# Altium PCB Copy of ThrustLayout.PcbDoc
Units mm, origin at the board's own origin, x right, y up, seen from the top; angles counter-clockwise.
Board outline 97.1 x 64.83 mm, 2 copper layers (Top Layer, Bottom Layer); 50 components, 32 nets, 165 pads, 69 vias.
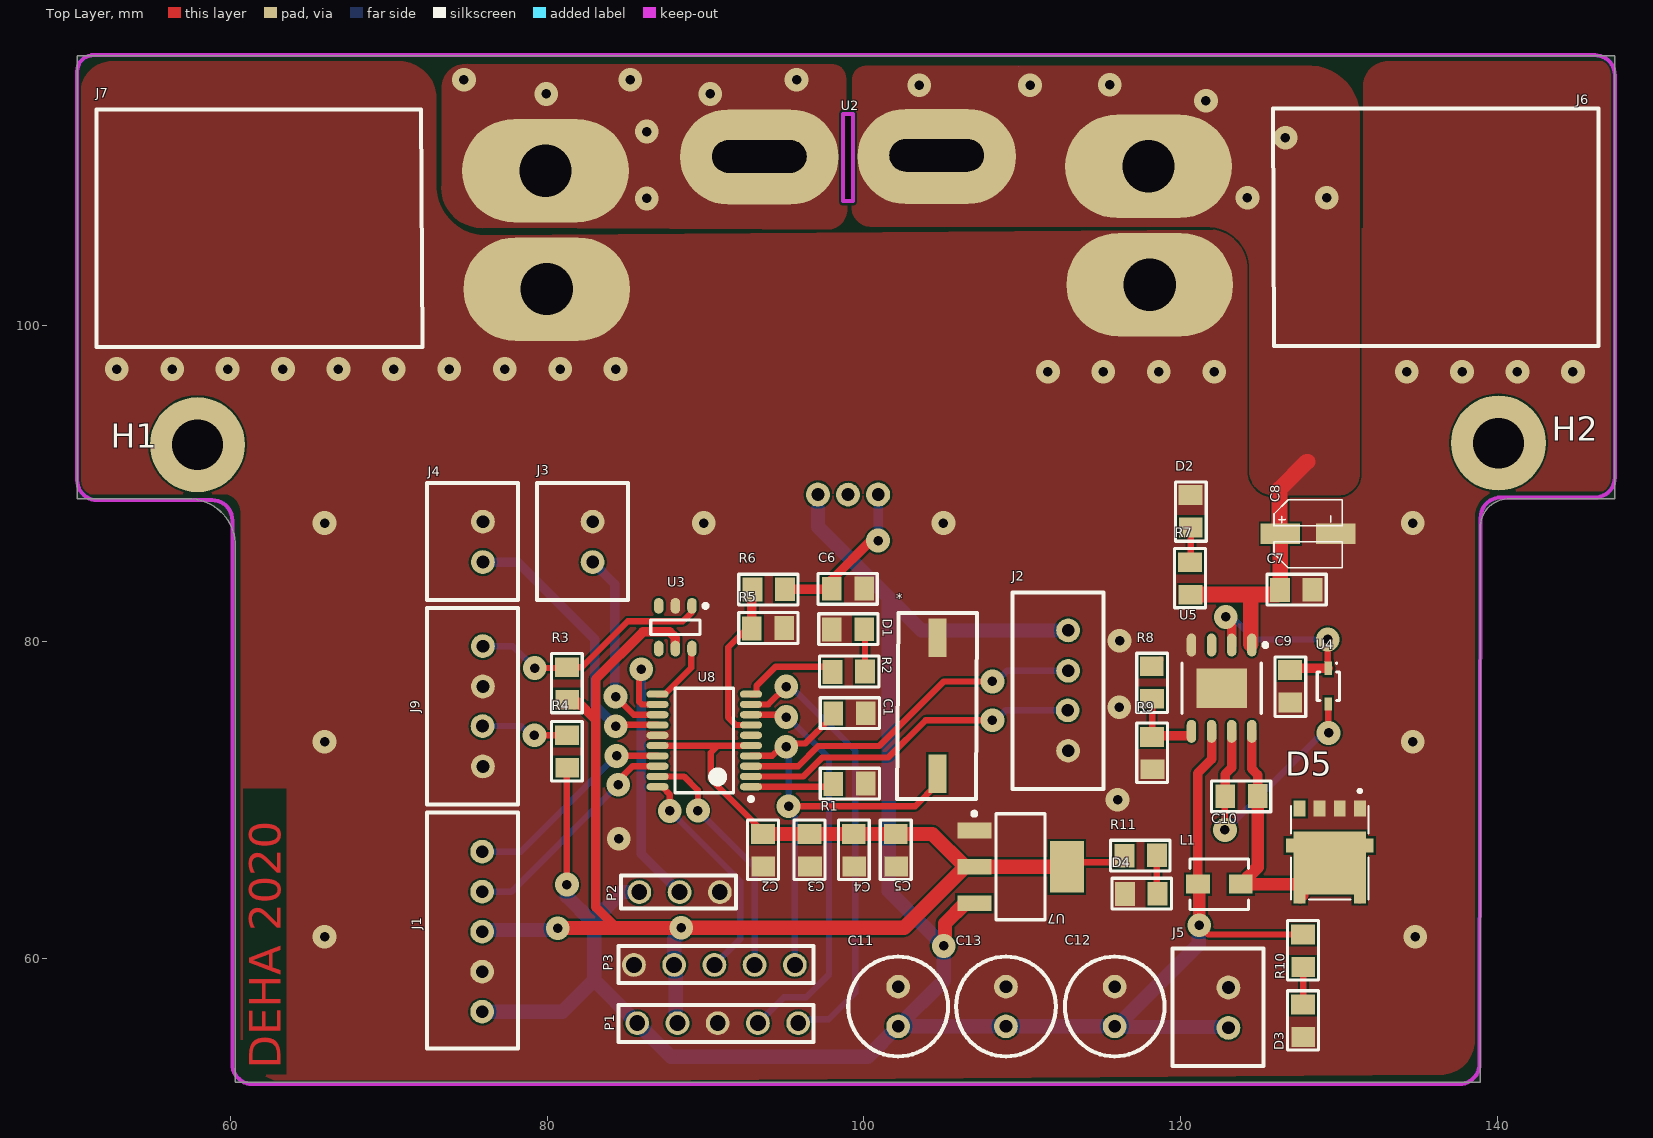
[diagram p0: Top Layer view]
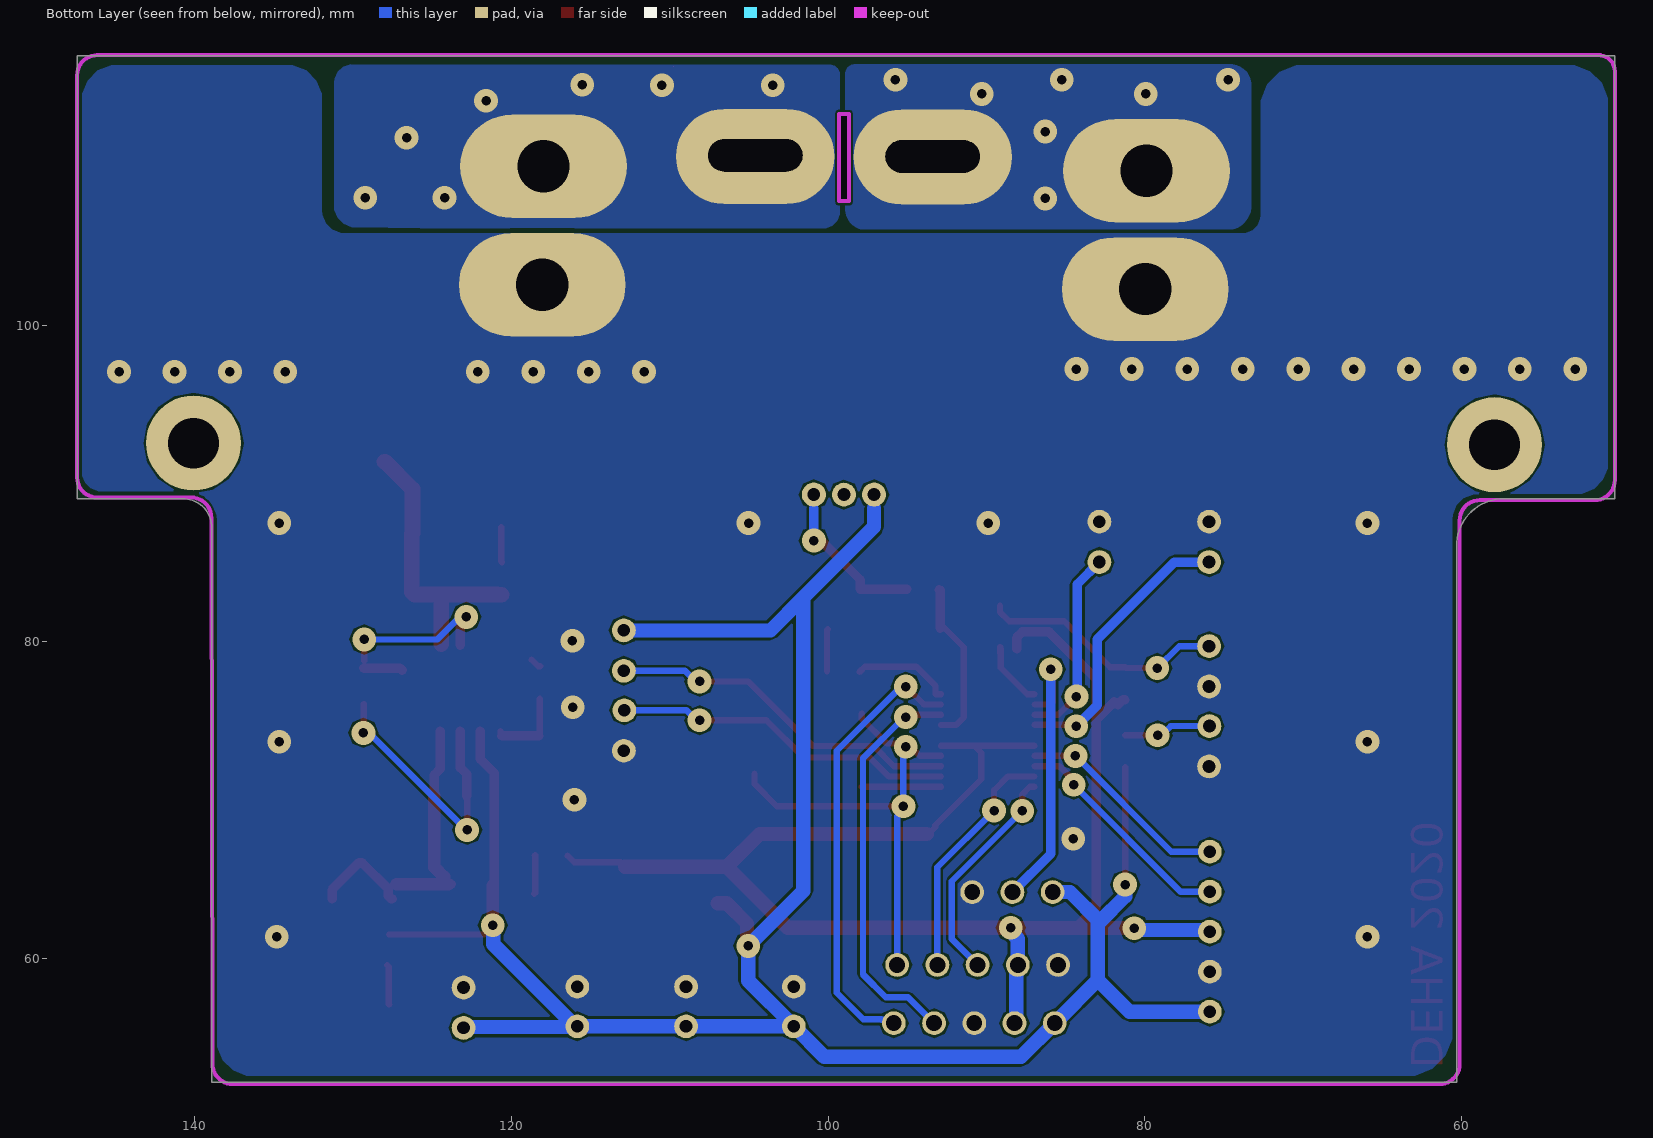
[diagram p1: Bottom Layer view, seen from below]

## Layer stack, top to bottom
Top Solder: solder mask 0.0102, Solder Resist, Dk 3.5
Top Layer: signal copper 0.0356
Dielectric 1: dielectric 0.32, FR-4, Dk 4.8
Bottom Layer: signal copper 0.0356
Bottom Solder: solder mask 0.0102, Solder Resist, Dk 3.5

## Board outline
60.325,52.2 138.925,52.2 138.925,87.225 cw(c140.74,87.225) 140.74,89.04 147.425,89.04 147.425,117.025 50.325,117.025 50.325,89.04 57.335,89.04 cw(c57.335,86.05) 60.325,86.05
cut-out: 98.675,113.342 98.675,107.808 99.325,107.808 99.325,113.342
cut-out: 109.75,116.35

## Design rules (kind name [scope] priority, off if disabled: settings)
Clearance [All] p1: gap=0.127 ignorepadtopadclearanceinfootprint=FALSE except(0: Arc-Hole Track-Hole SMDPad-Hole THPad-Hole Via-Hole Fill-Hole Poly-Hole Region-Hole Text-Hole)
DiffPairsRouting DiffPairsRouting_1 [All] p1: maxlimit=0.254 minlimit=0.254 mostfreqgap=0.254 toplayer_minwidth=0.381 toplayer_maxwidth=0.381 toplayer_prefwidth=0.381 bottomlayer_minwidth=0.381 bottomlayer_maxwidth=0.381 bottomlayer_prefwidth=0.381 maxuncoupledlength=12.7
DiffPairsRouting [All] p2: maxlimit=0.254 minlimit=0.254 mostfreqgap=0.254 toplayer_minwidth=0.381 toplayer_maxwidth=0.381 toplayer_prefwidth=0.381 bottomlayer_minwidth=0.381 bottomlayer_maxwidth=0.381 bottomlayer_prefwidth=0.381 maxuncoupledlength=12.7
PlaneConnect [All] p1: planeconnectstyle=Direct reliefexpansion=0.508 reliefentries=4 reliefconductorwidth=0.254 reliefairgap=0.254
PolygonConnect [All] p1: connectstyle=Direct reliefconductorwidth=0.254 reliefentries=4 polygonreliefangle="90 Angle" airgapwidth=0.254
PolygonConnect PolygonConnect_2 [All vs IsNamedPolygon('Top Layer-IP-')] p2: thpad.connectstyle=Direct thpad.reliefconductorwidth=0.254 thpad.reliefentries=4 thpad.polygonreliefangle="90 Angle" thpad.airgapwidth=0.254 smdpad.connectstyle=Relief smdpad.reliefconductorwidth=0.254 smdpad.reliefentries=4 smdpad.polygonreliefangle="90 Angle" smdpad.airgapwidth=0.254 via.connectstyle=Direct via.reliefconductorwidth=0.254 via.reliefentries=4 via.polygonreliefangle="90 Angle" via.airgapwidth=0.254
PolygonConnect PolygonConnect_1 [All vs IsNamedPolygon('IP-_L02_P020')] p3: thpad.connectstyle=Direct thpad.reliefconductorwidth=0.254 thpad.reliefentries=4 thpad.polygonreliefangle="90 Angle" thpad.airgapwidth=0.254 smdpad.connectstyle=Relief smdpad.reliefconductorwidth=0.254 smdpad.reliefentries=4 smdpad.polygonreliefangle="90 Angle" smdpad.airgapwidth=0.254 via.connectstyle=Direct via.reliefconductorwidth=0.254 via.reliefentries=4 via.polygonreliefangle="90 Angle" via.airgapwidth=0.254
RoomDefinition "" [InComponentClass('Thrust-Schematic')] p1: confinementstyle=ConfineIn formatcopy=TRUE lockcomponents=FALSE outline 0,0 50.8,0 50.8,25.4 0,25.4
RoutingVias [All] p1: holewidth=0.6 width=1.3 viastyle="Through Hole" minholewidth=0.5 minwidth=0.8 maxholewidth=1.5 maxwidth=1.5
SolderMaskExpansion [All] p1: expansion=0.102
Width [All] p1: maxlimit=1.5 minlimit=0.254 preferedwidth=0.4 minimp=50.000000 maximp=50.000000 favimp=50.000000
28 further rules are at their usual default settings.

## Components (designator, comment, footprint, x,y, rotation, side; value= is the part's Value field where it differs from the comment)
* "SWITCH" SWITCH 104.65,75.95 r270 top
C1 "470nF" RES0805 99.1,75.425 r180 top
C2 "1uF" RES0805 93.704,66.85 r270 top
C3 "100nF" RES0805 96.648,66.85 r270 top
C4 "10nF" RES0805 99.442,66.85 r270 top
C5 "1nF" RES0805 102.092,66.85 r270 top
C6 "100nF" RES0805 99,83.425 r0 top
C7 "1uF" RES0805 127.3,83.221 r180 top
C8 "10uF" Cap_4x5.4_SMD 128.05,86.825 r90 top
C9 "100nF" RES0805 126.854,77.196 r90 top
C10 "100nF" RES0805 123.85,70.325 r0 top
C11 "10uF" CAP_THT 102.142,57 r90 top
C12 "10uF" CAP_THT 115.817,57 r90 top
C13 "10uF" CAP_THT 108.95,57 r90 top
D1 "LED0805" RES0805 99,80.725 r180 top
D2 "LED0805" RES0805 120.575,88.254 r90 top
D3 "LED0805" RES0805 127.8,56.075 r270 top
D4 "LED0805" RES0805 117.525,64.023 r180 top
D5 "Diode" Schottky 129.42,66.688 r180 top
H1 "MOUNTING HOLE" "MOUNTING HOLE"#1 49.15,80.275 r0 top
H2 "MOUNTING HOLE" "MOUNTING HOLE"#2 143.3,82.2 r0 top
J1 "I2C" JST_XH_A_5 75.9,61.725 r0 top
J2 "JST_XH_A_4" JST_XH_A_4 112.9,76.925 r0 top
J3 "JST_XH_A_2" JST_XH_A_2 82.875,85.967 r0 top
J4 "JST_XH_A_2" JST_XH_A_2 75.95,85.967 r0 top
J5 "JST_XH_A_2" JST_XH_A_2 123.025,56.55 r0 top
J6 "XT60" XT60 118.05,102.55 r180 top
J7 "XT60" XT60 79.9,109.75 r0 top
J9 "JST_XH_A_4" JST_XH_A_4 75.95,75.933 r0 top
L1 "INDUCTOR" IND-IHLP-1212BZ-11 122.45,64.7 r180 top
P1 "UART_MATLAB" Pin_Header_1x5 85.695,55.925 r90 top
P2 "ESC" Pin_Header_1x3 85.825,64.2 r90 top
P3 "STM32_PROG" Pin_Header_1x5 95.645,59.6 r270 top
R1 "10K" RES0805 99.1,70.975 r180 top
R2 "860R" RES0805 99.05,78.05 r180 top
R3 "10K" RES0805 81.325,77.375 r270 top
R4 "220R" RES0805 81.325,73.075 r270 top
R5 "560R" RES0805 93.95,80.8 r180 top
R6 "560R" RES0805 94,83.375 r0 top
R7 "860R" RES0805 120.675,84 r270 top
R8 "860R" RES0805 118.129,77.431 r90 top
R9 "860R" RES0805 118.279,72.977 r270 top
R10 "860R" RES0805 127.8,60.5 r270 top
R11 "860R" RES0805 117.481,66.577 r0 top
U2 "ACS770" ACS770 99.002,89.3 r0 top
U3 "NL27WZ14" TSOP6 88.1,80.925 r270 top
U4 "DIODE-SOD323" SODFL250X100-2N 129.326,77.203 r270 top
U5 "NVC891330" SOIC8 122.595,77.075 r270 top
U7 "AMS1117" SOT223 109.9,65.8 r0 top
U8 "STM32F030" TSOP20 89.925,73.775 r180 top

## Footprints (in the part's own frame and the unit in brackets; to place one, negate y for a bottom-side part, rotate by r counter-clockwise, add the part's x,y. Pads: shape width x height; smd on the part's side, far side on the other; paste and mask are expansions set on the pad)
ACS770 [mm]
  round 1.524 hole 0.8: 1(-1.9,0) 3(1.9,0)
  round 1.5 hole 0.8: 2(0,0)
  rrect100% 10x6 smd: 4(5.6,21.35) 5(-5.6,21.325)
  rrect100% 10x6 smd far side: 4(5.6,21.35) 5(-5.6,21.325)
  rrect100% 5.97x2.043 hole 2.043 slot 5.97 at 0 deg: 4(5.6,21.42) 5(-5.6,21.35)
Cap_4x5.4_SMD [mm]
  rect 1.3x2.5 smd mask+0.05: 1(0,1.75) 2(0,-1.75)
  Top Layer pour cut-out: -1.65,0.95
  silkscreen extent -2.15,-2.15 2.15,2.15, body extent -2.15,-2.5 2.15,2.5, height 5.4
CAP_THT [mm]
  round 1.5 hole 0.8: 1(-1.275,-0.025) 2(1.225,-0.025)
  silkscreen extent -3.17,-3.17 3.12,3.12
IND-IHLP-1212BZ-11 [mm] "Molded Inductor, 2-Leads, Body 3.33x3.00mm, IPC Medium Density"
  rect 1.5x1.2 smd: 1(-1.35,0) 2(1.35,0)
  silkscreen extent -1.85,-1.6 1.85,1.6, body extent -2.04,-1.6 2.04,1.6, height 2
JST_XH_A_2 [mm]
  round 1.5 hole 0.8: 1(0,1.625) 2(0,-0.925)
  silkscreen extent -3.53,-3.32 2.22,4.08
JST_XH_A_4 [mm]
  round 1.5 hole 0.8: 1(0,3.8) 2(0,1.25) 3(-0.025,-1.25) 4(0,-3.8)
  silkscreen extent -3.52,-6.2 2.22,6.2
JST_XH_A_5 [mm]
  round 1.5 hole 0.8: 1(0,5.025) 2(0,2.5) 3(0,-0.025) 4(0,-2.55) 5(0,-5.075)
  silkscreen extent -3.47,-7.4 2.28,7.5
"MOUNTING HOLE"#1 [mm]
  round 6 hole 3.2 unplated: 1(8.775,12.175)
"MOUNTING HOLE"#2 [mm]
  round 6 hole 3.2 unplated: 1(-3.225,10.35)
Pin_Header_1x3 [mm]
  round 1.5 hole 1: 1(0,0) 2(0,-2.54) 3(0,-5.08)
  silkscreen extent -1.02,-6.1 1.05,1.15
Pin_Header_1x5 [mm]
  round 1.5 hole 1: 1(0,0) 2(0,-2.54) 3(0,-5.08) 4(0,-7.62) 5(0,-10.16)
  silkscreen extent -1.33,-11.12 1.15,1.17
RES0805 [mm]
  rect 1.25x1.5 smd: 1(-1.025,-0.075) 2(1.025,-0.05)
  silkscreen extent -1.9,-1.05 1.85,0.9
Schottky [mm]
  rect 0.75x1 smd: 1(-1.905,-2.795) 1(-0.635,-2.795) 1(0.635,-2.795) 4(1.905,-2.795)
  rect 0.495x0.905 smd: 2(-2.528,-0.453) 2(2.528,-0.453)
  rect 0.75x0.575 smd: 2(-1.905,2.913) 2(1.905,2.913)
  rect 4.56x3.955 smd: 2(0,0.647)
  silkscreen extent -2.45,-4 2.45,2.95, body extent -2.7,-2.95 2.45,3.2, height 1.13
SODFL250X100-2N [mm] "SODFL, 2-Leads, Body 1.25x2.50mm, IPC Medium Density"
  rect 0.85x0.45 smd: 1(-1.125,0) 2(1.125,0)
  silkscreen extent -1.5,-0.7 0.9,0.7, body extent -1.25,-0.67 1.25,0.67, height 1
SOIC8 [mm] "SOIC, 8-Leads, Body 4.90x3.90mm, Pitch 1.27mm, Thermal Pad 3.20x2.51mm, IPC Medium Density"
  oval 1.45x0.6 smd: 1(-2.725,1.905) 2(-2.725,0.635) 3(-2.725,-0.635) 4(-2.725,-1.905) 5(2.725,-1.905) 6(2.725,-0.635) 7(2.725,0.635) 8(2.725,1.905)
  rect 2.51x3.2 smd: 4(0,0)
  silkscreen extent -2.85,-2.5 1.6,2.88, body extent -3,-2.5 3,2.5, height 1.75
SOT223 [mm] "SOT223, 4-Leads, Body 6.50x7.00mm (avg), Pitch 2.30mm, IPC Medium Density"
  rect 2.15x1 smd: 1(-2.925,2.3) 2(-2.925,0) 3(-2.925,-2.3)
  rect 2.15x3.25 smd: 2(2.925,0)
  silkscreen extent -3.05,-3.35 1.55,3.47, body extent -3.5,-3.35 3.5,3.35, height 1.8
SWITCH [mm]
  rect 2.43x1.14 smd: 1(-4.3,0) 2(4.275,0)
  silkscreen extent -5.87,-2.55 5.87,2.5
TSOP6 [mm] "TSOP, 6-Leads, Body 3.00x1.50mm, Pitch 1.05mm, IPC Medium Density"
  oval 1x0.6 smd: 1(-1.35,1.05) 2(-1.35,0) 3(-1.35,-1.05) 4(1.35,-1.05) 5(1.35,0) 6(1.35,1.05)
  silkscreen extent -1.47,-1.55 0.45,2.03, body extent -1.38,-1.55 1.38,1.55, height 1.1
TSOP20 [mm] "TSOP, 20-Leads, Body 6.50x4.40mm, Pitch 0.65mm, IPC Medium Density"
  oval 1.4x0.45 smd: 1(-2.95,2.925) 2(-2.95,2.275) 3(-2.95,1.625) 4(-2.95,0.975) 5(-2.95,0.325) 6(-2.95,-0.325) 7(-2.95,-0.975) 8(-2.95,-1.625) 9(-2.95,-2.275) 10(-2.95,-2.925) 11(2.95,-2.925) 12(2.95,-2.275) 13(2.95,-1.625) 14(2.95,-0.975) 15(2.95,-0.325) 16(2.95,0.325) 17(2.95,0.975) 18(2.95,1.625) 19(2.95,2.275) 20(2.95,2.925)
  silkscreen extent -3.08,-3.3 1.85,3.82, body extent -3.9,-3.55 3.9,3.55, height 1.2
XT60 [mm]
  rrect100% 10.524x6.524 smd: 1(0,0) 2(0.075,-7.475)
  round 1.524 hole 3.3: 1(0,0) 2(0.075,-7.475)
  rrect100% 10.524x6.524 smd far side: 1(0,0) 2(0.075,-7.475)
  silkscreen extent -28.35,-11.12 -7.77,3.88

## Part data
C1 C2 C3 C4 C5 C6 C7 C9 C10: library part CAP0805
C8: library part SMD_Cap_4x5.4
C11 C12 C13: library part CAP_THT
D5: library part "Schottyky Diode", "Schottky Diode"
J1: library part JST_XH_A_5
L1: "IHLP-1212BZ-11"
P1 P3: library part Pin_Header_1x5
P2: library part Pin_Header_1x3
R1 R2 R3 R4 R5 R6 R7 R8 R9 R10 R11: library part RES0805

## Via types
v1: diameter 1.5, hole 0.6, Top Layer to Bottom Layer, 69 vias

## Nets (pads, with @x,y where several pads share a name; then routed paths per layer and width w, separated by ;. In a path a pad name is that pad's centre, name@x,y a point inside that pad or via, vN(x,y) a via of type N, cw(c..) or ccw(c..) an arc to the next point about the centre after c; other vN are vias at no path point)
3.3V: C2.1 C3.1 C4.1 C5.1 J1.3 P1.2 P3.4 R3.2 R11.1 U3.5 U7.2 U8.5 U8.16 | length 101.1
  Top Layer w0.4: R3.2@81.338,76.35 R3.2@81.4,76.35 ; U8.16 90.782,73.45 ; U8.5 90.782,73.45 ; C2.1@93.779,67.875 93.654,67.875 93.229,68.3 93.229,68.425 90.325,71.329 90.325,72.993 90.782,73.45 ; U7.2@112.825,65.8 113.102,66.077 116.031,66.077 R11.1
  Top Layer w0.6: R3.2 R3.2@81.338,76.35 ; R3.2@81.4,76.35 R3.2@81.725,76.025 ; R3.2@81.925,76.225 83.075,75.075 ; 84.388,61.938 83.075,63.25 83.075,75.075 ; U3.5 88.1,79.775 88.101,79.776 88.101,80.274 87.75,80.625 86.05,80.625 83.075,77.65 83.075,75.075
  Top Layer w0.9: v1(80.675,61.925) 80.688,61.938 84.388,61.938 88.463,61.938 v1(88.475,61.95) 102.55,61.95 U7.2@106.4,65.8 ; C2.1@93.779,67.875 C3.1 C4.1 C5.1 104.325,67.875 U7.2@106.4,65.8 ; U7.2@112.825,65.8 106.975,65.8 U7.2@106.4,65.8
  Bottom Layer w0.9: J1.3 76.013,61.813 80.563,61.813 v1(80.675,61.925) ; P1.2 88.13,56.03 88.13,59.495 P3.4 88.025,61.256 88.475,61.706 v1(88.475,61.95)
5V: C11.1 C12.1 C13.1 J1.5 J2.1 J5.2 L1.2 P1.1 P2.1 R4.2 R10.1 U2.1 U5.6 U7.3 | length 150.1
  Top Layer w0.4: v1(81.25,64.675) R4.2@81.25,72.075 ; L1.2 L1.2@121.175,64.625 ; v1(121.175,62.1) 121.75,61.525 R10.1
  Top Layer w0.6: L1.2 121.078,64.722 121.078,71.703 121.96,72.585 U5.6
  Top Layer w0.8: v1(121.175,62.1) L1.2@121.175,64.625
  Top Layer w0.9: v1(105.05,60.8) 105.121,60.871 105.121,62.221 106.4,63.5 U7.3
  Bottom Layer w0.9: J1.5 80.975,56.65 82.973,58.648 ; v1(81.25,64.675) 81.25,63.925 82.85,62.325 84.725,64.2 P2.1 ; 82.973,62.448 82.973,58.648 ; 97.102,88.445 97.102,87.273 101.575,82.8 ; J2.1 103.65,80.725 101.575,82.8 ; v1(121.175,62.1) 121.15,62.075 121.15,60.9 115.975,55.725 C12.1 ; J5.2 122.975,55.675 115.892,55.675 C12.1 ; 82.973,58.648 P1.1 87.82,53.8 100.242,53.8 C11.1 ; 101.575,82.8 101.575,64.275 v1(105.05,60.8) 105.05,58.608 C11.1 ; C11.1 C13.1 C12.1
11.1V: C7.2 C8.1 J6.2 R7.2 R8.2 U2.4 U5.1 | length 22.7
  Top Layer w0.4: R8.2 118.304,78.456 R8.2@118.729,78.881
  Top Layer w0.9: J6.2@117.975,109.575 118.187,109.363 J6.2@121.962,109.363
  Top Layer w1: R7.2 120.853,82.975 120.875,82.997 124.435,82.997 ; U5.1@124.435,79.865 124.435,82.997 ; 128.025,91.375 127.975,91.375 126.256,89.656 126.256,86.869 C8.1 126.3,83.296 C7.2 126.275,83.146 126.126,82.997 124.435,82.997
  other v1: 124.225,108.05 129.225,108.05 126.625,111.825 121.6,114.175 103.5,115.15 110.5,115.15 115.525,115.175
ADC_IN: R5.2 R6.1 U8.7 | length 10.5
  Top Layer w0.4: U8.7 91.925,74.75 91.45,75.225 91.45,79.65 92.65,80.85 R5.2
  Top Layer w0.6: R5.2 92.925,83.25 R6.1
BOOT0: R1.2 U8.1 | length 5
  Top Layer w0.4: U8.1 R1.2@97.875,70.85
BST: C10.1 U4.2 U5.7 | length 17.3
  Top Layer w0.4: v1(122.8,68.125) 122.8,70.225 C10.1 ; U4.2 129.326,74.27 v1(129.345,74.252)
  Top Layer w0.6: C10.1 122.825,71.655 123.23,72.06 U5.7
  Bottom Layer w0.4: v1(122.8,68.125) 122.863,68.125 128.982,74.245 v1@129.345,74.245
DATA_IN: J2.2 U8.3 | length 22.5
  Top Layer w0.4: U8.3 95.85,72.15 97.125,73.425 100.975,73.425 105.05,77.5 v1(108.125,77.5)
  Bottom Layer w0.4: v1(108.125,77.5) 108.369,77.5 109.044,78.175 J2.2
DRV: C9.2 U4.1 U5.2 | length 12.8
  Top Layer w0.4: 129.3,78.811 v1(129.3,80.15)
  Top Layer w0.6: v1(122.85,81.571) 122.85,81.382 123.23,81.002 U5.2 ; C9.2 127.012,78.328 U4.1
  Bottom Layer w0.4: v1(122.85,81.571) 122.886,81.607 123.218,81.607 124.675,80.15 v1(129.3,80.15)
GND: *.1 C1.1 C2.2 C3.2 C4.2 C5.2 C6.2 C7.1 C8.2 C9.1 C11.2 C12.2 C13.2 D1.2 D2.2 D3.2 D4.2 D5.1 J1.4 J2.4 J3.1 J4.1 J5.1 J6.1 J7.2 J9.2 J9.4 P1.3 P2.3 P3.5 R1.1 R5.1 R9.2 U3.2 U5.4 U7.1 U8.15
  other v1: 65.95,61.375 134.815,61.375 84.525,67.575 116.025,70.025 65.95,73.7 134.665,73.7 116.125,75.875 116.15,80.075 65.95,87.5 89.9,87.5 105.025,87.5 134.665,87.5 111.625,97.05 115.125,97.05 118.625,97.05 122.125,97.05 134.275,97.05 137.775,97.05 141.275,97.05 144.775,97.05 52.825,97.225 56.325,97.225 59.825,97.225 63.325,97.225 66.825,97.225 70.325,97.225 73.825,97.225 77.325,97.225 80.825,97.225 84.325,97.225
IP-: J7.1 U2.5 | length 0.7
  Top Layer w0.6: U2.5@92.725,110.625 U2.5@93.402,110.625
  other v1: 86.3,108 86.3,112.225 79.95,114.6 90.3,114.6 74.75,115.5 85.25,115.5 95.75,115.5
IR_LED_IN: J9.1 R3.1 U3.1 | length 15.6
  Top Layer w0.4: v1(79.225,78.35) 81.2,78.35 R3.1 82.2,78.4 85.1,81.3 88.575,81.3 89.15,81.875 U3.1
  Bottom Layer w0.4: J9.1 77.842,79.733 v1(79.225,78.35)
IR_LED_OUT: U3.6 U8.11 | length 4.4
  Top Layer w0.4: U8.11 87.425,76.7 89.1,78.375 89.1,79.575 U3.6@89.125,79.575 ; U3.6@89.125,79.3 U3.6@89.125,79.575 ; U3.6@89.125,79.675 U3.6@89.125,79.575
NetC6_1: C6.1 R6.2 U2.3 | length 9.5
  Top Layer w0.6: R6.2 95.037,83.337 97.963,83.337 C6.1 97.975,83.925 100.45,86.4 v1(100.9,86.4)
  Bottom Layer w0.6: v1(100.9,86.4) 100.901,86.401 100.901,88.444 100.902,88.445
NetC10_2: C10.2 D5.2 L1.1 U5.8 | length 19.9
  Top Layer w0.6: L1.1 123.95,64.7 124.25,65 L1.1@124.25,65.15 ; U5.8 124.5,71.975 124.875,71.6 C10.2 ; D5.2@127.515,63.775 127.578,63.775 127.768,63.965 127.768,64.388 129.42,66.04 129.647,66.04 131.325,64.363 D5.2@131.325,63.775
  Top Layer w0.8: L1.1@123.95,64.7 D5.2@127.27,64.7 ; L1.1@124.25,65.15 124.875,65.775 C10.2
NetD1_1: D1.1 R2.1 | length 2.7
  Top Layer w0.4: D1.1 100.075,80.75 R2.1
NetD2_1: D2.1 R7.1 | length 2.2
  Top Layer w0.4: R7.1 120.65,85.075 D2.1
NetD3_1: D3.1 R10.2 | length 2.5
  Top Layer w0.4: D3.1 127.75,57.125 R10.2 R10.2@127.85,59.575
NetD4_1: D4.1 R11.2 | length 2.5
  Top Layer w0.4: R11.2@118.525,66.508 R11.2 118.506,64.142 D4.1
NetJ9_3: J9.3 R4.1 | length 5.6
  Top Layer w0.4: v1(79.2,74.1) R4.1
  Bottom Layer w0.4: J9.3 78.373,74.683 78.956,74.1 v1(79.2,74.1)
NetR8_1: R8.1 R9.1 U5.5 | length 5.1
  Top Layer w0.4: R8.1 R9.1 R9.1@118.277,74.075 ; U5.5@120.598,74.075 120.69,74.167 U5.5
  Top Layer w0.6: R9.1@118.277,74.075 U5.5@120.598,74.075
NRST: *.2 C1.2 P3.1 U8.4 | length 30.9
  Top Layer w0.4: U8.4 94.227,72.8 94.802,73.375 v1(95.1,73.375) 95.31,73.585 96.31,73.585 97.875,75.15 C1.2@97.875,75.475 ; v1(95.25,69.619) 103.239,69.619 104.65,71.03 *.2
  Bottom Layer w0.4: v1(95.1,73.375) 95.25,73.225 v1(95.25,69.619) 95.25,69.375 95.645,68.98 P3.1
PULL_DOWN0: J3.2 U8.13 | length 12.2
  Top Layer w0.4: v1(84.325,76.55) 85.475,75.4 U8.13
  Bottom Layer w0.4: v1@84.275,76.6 v1(84.325,76.55)
  Bottom Layer w0.6: J3.2 84.275,83.642 v1@84.275,76.6
PULL_DOWN1: J4.2 U8.14 | length 17.8
  Top Layer w0.4: v1(84.33,74.68) 84.41,74.76 86.965,74.76 U8.14
  Bottom Layer w0.6: J4.2 78.133,85.042 83,80.175 83,76.01 v1(84.33,74.68)
RX: P1.5 U8.9 | length 28.1
  Top Layer w0.4: U8.9 93.975,76.05 v1(95.1,77.175)
  Bottom Layer w0.4: v1@95.4,77.175 99.46,73.115 99.46,57.837 97.785,56.162 96.639,56.162 96.613,56.135 96.065,56.135 P1.5
SCK_OUT: J2.3 U8.2 | length 21.8
  Top Layer w0.4: U8.2 96.175,71.5 97.375,72.7 101.55,72.7 103.9,75.05 v1@108.075,75.05
  Bottom Layer w0.4: v1@108.125,75.1 108.075,75.05 108.319,75.05 108.944,75.675 J2.3
  other v1: 108.125,75.05
SCL: J1.1 U8.17 | length 13.6
  Top Layer w0.4: v1(84.387,72.8) U8.17
  Bottom Layer w0.4: J1.1 78.337,66.75 v1(84.387,72.8)
SDA: J1.2 U8.18 | length 14.5
  Top Layer w0.4: v1(84.5,70.975) 84.5,71.25 85.39,72.14 86.965,72.14 U8.18
  Bottom Layer w0.4: J1.2 77.75,64.225 v1(84.5,70.975)
SWCLK: P3.3 U8.20 | length 14.3
  Top Layer w0.4: U8.20 87.262,70.85 87.75,70.362 v1(87.75,69.325)
  Bottom Layer w0.4: v1(87.75,69.325) 92.2,64.875 92.2,61.235 P3.3
SWDIO: P3.2 U8.19 | length 15.4
  Top Layer w0.4: U8.19 88.65,71.5 89.525,70.625 v1(89.525,69.35)
  Bottom Layer w0.4: v1(89.525,69.35) 93.105,65.77 P3.2
TEST_LED: R2.2 U8.10 | length 6.3
  Top Layer w0.4: U8.10 93.202,76.7 93.225,76.723 93.225,77.225 94.425,78.425 97.7,78.425 R2.2
TIM3_CH1: P2.2 U8.12 | length 18.4
  Top Layer w0.4: v1(85.95,78.275) 85.8,78.125 85.8,76.225 85.975,76.05 U8.12
  Bottom Layer w0.6: v1(85.95,78.275) 85.95,66.615 P2.2
TX: P1.4 U8.8 | length 25.4
  Top Layer w0.4: U8.8 92.885,75.39 94.96,75.39 v1(95.1,75.25)
  Bottom Layer w0.4: P1.4 94.958,57.568 96.368,57.568 97.8,59 97.8,72.65 v1@95.2,75.25
pads on no net: D5.4 H1.1 H2.1 U2.2 U3.3 U3.4 U5.3 U8.6

## Polygon pours and split planes (outlines as drawn)
11.1V on Top Layer "11.1V" (solid, pour order 28): 99.273,115.498 99.225,107.475 ccw(c100.492,107.467) 100.5,106.2 100.775,106.2 101.8,106.2 103.225,106.2 121.7,106.2 cw(c121.7,103.55) 124.35,103.55 124.35,90.775 ccw(c125.875,90.775) 125.875,89.25 129.975,89.25 ccw(c129.975,90.582) 131.307,90.582 131.307,113.168 ccw(c128.088,113.168) 128.088,116.387 100.161,116.387 ccw(c100.168,115.493)
IP- on Top Layer "IP-" (solid, pour order 27): 75.148,116.475 98.025,116.475 cw(c98.025,115.625) 98.875,115.625 98.875,115.075 98.95,107.55 cw(c97.625,107.35) 97.95,106.05 76.077,106.143 cw(c75.893,108.7) 73.337,108.895 73.337,114.947 cw(c74.887,114.947)
GND on Top Layer "GND" (solid, pour order 29): 60.645,88.23 60.645,62.775 60.645,55.205 ccw(c63.65,55.205) 63.65,52.2 69.602,52.2 136.392,52.66 ccw(c136.377,54.858) 138.575,54.858 138.575,87.94 cw(c140.125,87.94) 140.117,89.489 147.422,89.526 147.263,116.649 133.076,116.651 ccw(c133.076,115.125) 131.55,115.125 131.55,106.104 76.146,105.675 cw(c76.155,108.83) 73,108.83 73,114.325 ccw(c70.674,114.325) 70.674,116.651 52.526,116.651 ccw(c52.526,114.675) 50.55,114.675 50.55,89.325 59.55,89.325 cw(c59.55,88.23)
GND on Bottom Layer "GND" (solid, pour order 40): 50.774,113.824 50.774,91.355 ccw(c52.778,91.355) 52.771,89.351 59.003,89.329 cw(c58.997,87.726) 60.6,87.726 60.6,55.525 ccw(c63.525,55.525) 63.525,52.6 136.275,52.6 ccw(c136.275,54.9) 138.575,54.9 138.575,87.625 cw(c140.45,87.625) 140.45,89.5 145.85,89.5 ccw(c145.85,90.75) 147.1,90.75 147.1,114.15 ccw(c144.825,114.15) 144.825,116.425 134.25,116.425 ccw(c134.25,114.15) 131.975,114.15 131.975,107.25 cw(c130.526,107.249) 130.525,105.8 73.825,105.8 cw(c73.825,106.925) 72.7,106.925 72.7,113.6 ccw(c69.875,113.6) 69.875,116.425 53.375,116.425 ccw(c53.375,113.824)
11.1V on Bottom Layer "GND" (solid, pour order 39): 125.77,106.125 129.815,106.181 ccw(c129.796,107.559) 131.175,107.559 131.175,115.322 ccw(c129.986,115.261) 129.925,116.45 99.91,116.45 ccw(c99.91,115.805) 99.275,115.921 99.275,116.35 99.275,107.2 ccw(c100.35,107.2) 100.35,106.125 125.75,106.125 cw(c125.751,105.727)
IP- on Bottom Layer "IP-" (solid, pour order 31): 98.925,115.867 ccw(c98.321,115.867) 98.2,116.459 74.584,116.459 ccw(c74.584,115.166) 73.291,115.166 73.291,107.537 ccw(c74.834,107.537) 74.421,106.05 97.975,106.05 ccw(c97.526,107.375) 98.925,107.375

## Keep-outs
Keep-Out Layer:
  lines w0.254: 51.23,117.043 55.111,117.05 ; 51.35,117.05 ccw(c51.35,116.025) 50.325,116.025 50.325,91.1 50.325,90.32 50.325,90.22 ccw(c51.595,90.22) 51.595,88.95 58.855,88.95 cw(c58.855,87.68) 60.125,87.68 60.125,53.345 ccw(c61.395,53.345) 61.395,52.075 85.2,52.075 125.475,52.075 133.95,52.075 137.605,52.075 ccw(c137.605,53.345) 138.875,53.345 138.875,54.45 ; 52.968,117.043 ccw(c52.968,117.05) 52.975,117.05 144.45,117.05 146.155,117.05 cw(c146.155,115.78) 147.425,115.78 147.425,114.4 147.425,91.15 147.425,90.385 cw(c146.155,90.385) 146.155,89.115 140.22,89.115 ccw(c140.22,87.845) 138.95,87.845 138.95,87.05 138.875,54.45 ; 138.875,53.47 138.875,54.45 ; 98.675,107.825 99.325,107.825 99.325,113.325 98.7,113.325 98.675,107.825

## Other copper
Top Layer:
  pour cut-out: 74.425,116.65
  pour cut-out: 74.811,115.7
  text "DEHA 2020" at 63.171,53.054 h2 r90